# EAGLE board ardcore_smd_panel (EAGLE 7.2.0)

Size 40.3 x 128 mm. Coordinates in mm from the lower left corner, seen from the top.
Outline: 40.3,128 0,128 0,0 40.3,0 40.3,128
Copper layers (1*16): Top 0.0356mm / dielectric 1.5011mm / Bottom 0.0356mm
Design rules "LaenPCBOrder": minimum track width 6mil, minimum drill 13mil, track to track 6mil, track to pad 6mil, pad to pad 6mil, via to via 6mil, smd to smd 6mil, copper to edge 15mil, drill to drill 6mil, minimum pad ring 7mil, minimum via ring 7mil, stop-mask expansion 3mil, vias tented up to drill 0mil, thermal gap 10mil
Net classes: 0 default: width 0.406 mm, drill 0.254 mm, clearance 0.254 mm; 2 Power: width 0.61 mm, drill 0.508 mm, clearance 0.305 mm; 3 GND: width 0.61 mm, drill 0.508 mm, clearance 0.305 mm
Holes 3.2 mm at -14.65,44.76
Milling: area 3.1,89.3 to 9.6,95.7; area 30.7,89.3 to 37.1,95.7; area 3.1,58.3 to 9.6,64.7; area 30.7,58.3 to 37.1,64.7; area 1.4,32.8 to 7.9,39.2; area 11.8,32.8 to 18.2,39.2; area 22.1,32.8 to 28.5,39.2; area 32.4,32.8 to 38.9,39.2; area 1.4,16.8 to 7.9,23.2; area 11.8,16.8 to 18.2,23.2; area 32.6,16.8 to 39,23.2; area 2.8,104.9 to 10,112.1; 7 more areas

## Placement (x,y rotation side)
U$1  [AGUJERO_OVALADO]  36.7,125.38 0 top
U$2  [AGUJERO_OVALADO]  3.6,2.6 0 top
U$3  [AGUJERO_OVALADO]  36.7,2.6 0 top
U$4  [AGUJERO_OVALADO]  3.6,125.38 0 top

## Library data of the parts
U$1-U$4 = Agujeros

## Text on the board
Top: A0 | A1 | A2 | A3 | D0 | D1 | D2 | D3 | RESET | CLOCK / IN | OUT
tNames: 20Objects | Ardcore | ttreintaysiete
tStop: A0 | A1 | A2 | A3 | D0 | D1 | D2 | D3 | RESET | CLOCK / IN | OUT